# Altium PCB PCB1.PcbDoc (part 2 of 2)
Units mm, origin at the board's own origin, x right, y up, seen from the top; angles counter-clockwise.
Board outline 124.21 x 71.38 mm, 4 copper layers (Top Layer, Int1 (GND), Int2 (PWR), Bottom Layer), stack 1.369 mm thick; 127 components, 91 nets, 539 pads, 880 vias.
Unrouted connection lines stored in the file: 8.
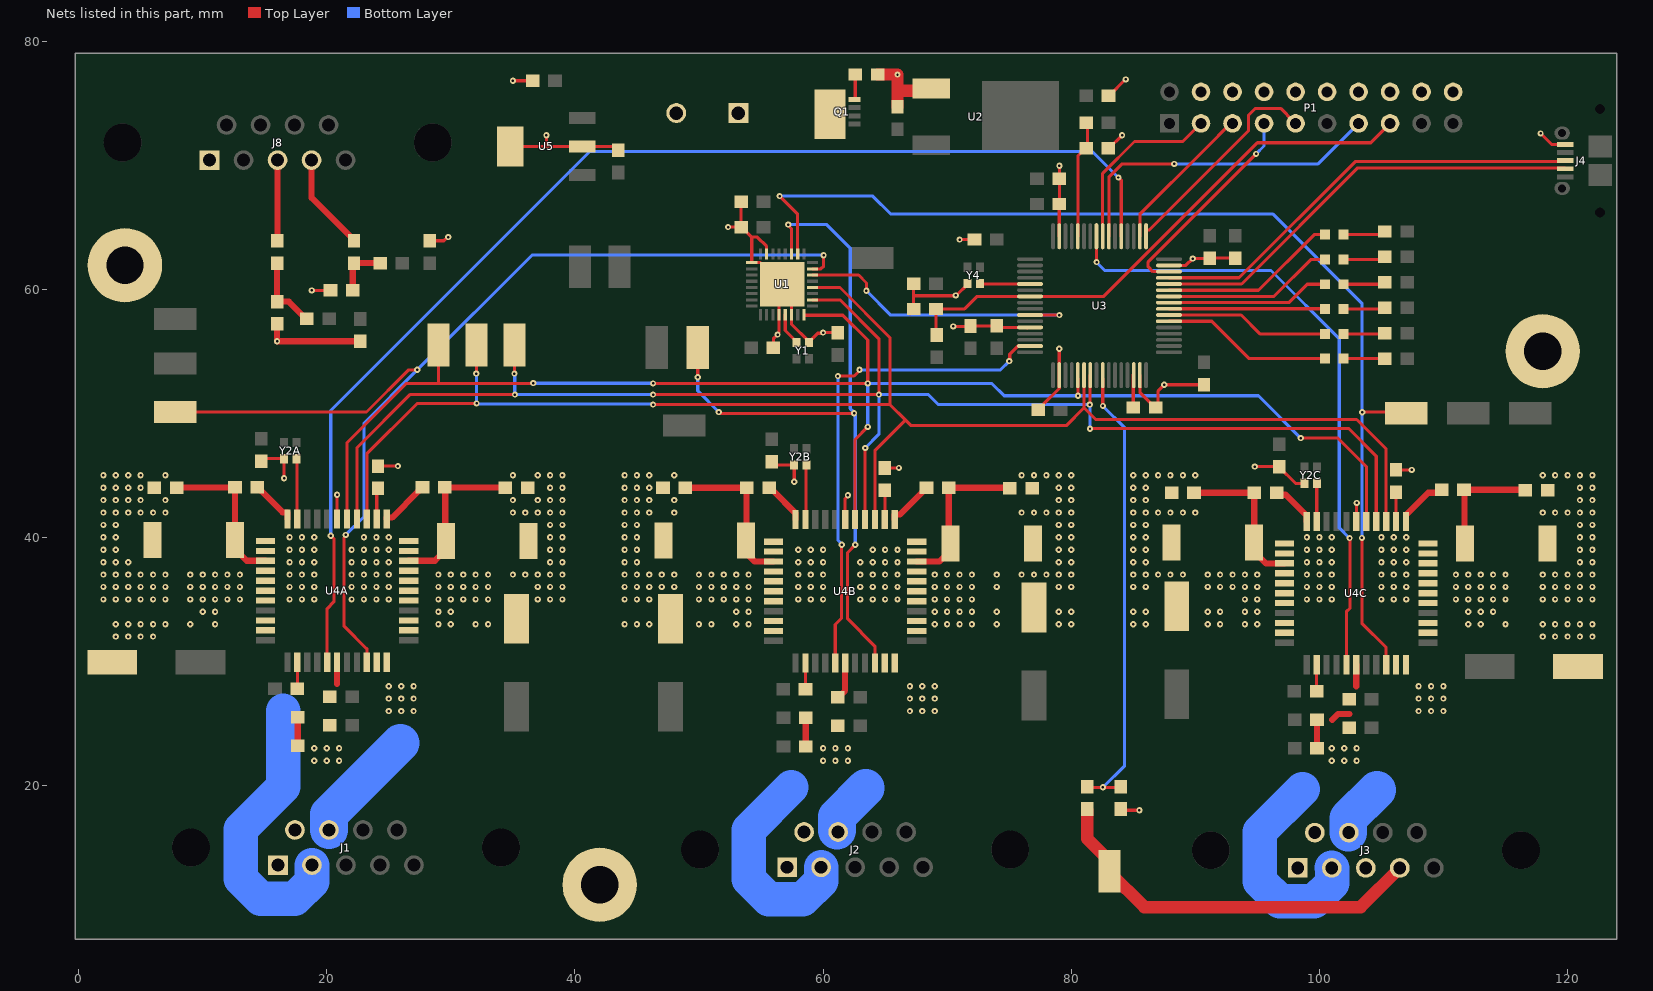
[diagram p4: the nets of this part, all layers, seen from the top]

## Via types
v1: diameter 0.5, hole 0.2, Top Layer to Bottom Layer, 880 vias

## Nets (pads, with @x,y where several pads share a name; then routed paths per layer and width w, separated by ;. In a path a pad name is that pad's centre, name@x,y a point inside that pad or via, vN(x,y) a via of type N, cw(c..) or ccw(c..) an arc to the next point about the centre after c; other vN are vias at no path point) (continued)
GND: C1.1 C2.1 C4.1 C5A.1 C5B.1 C5C.1 C6A.1 C6B.1 C6C.1 C7.1 C8.1 C9.1 C10.1 C11.1 C12.1 C13.1 C14.1 C15.1 C16.1 C18.1 C19.1 C21.1 C22.1 C23A.2 C23B.2 C23C.2 C24A.2 C24B.2 C24C.2 C25A.2 C25B.2 C25C.2 C26A.2 C26B.2 C26C.2 C27A.1 C27B.1 C27C.1 C28A.1 C28B.1 C28C.1 C29A.1 C29B.1 C29C.1 C30A.1 C30B.1 C30C.1 C31.1 C32.1 C33.1 C34.1 C35.1 C36.1 J3.3 J4.5 J5.2 J8.1 P1.4 P1.6 P1.8 P1.10 P1.12 P1.14 P1.16 P1.18 P1.20 pad.3 pad.4 R9.1 R12.2 R14.1 R18.1 R20A.2 R20B.2 R20C.2 R21A.2 R21B.2 R21C.2 U1.4 U1.6 U1.23 U1.25 U1.33 U2.1 U3.12 U3.18 U3.31 U3.47 U3.63 U4A.17 U4A.39 U4A.43 U4A.44 U4B.17 U4B.39 U4B.43 U4B.44 U4C.17 U4C.39 U4C.43 U4C.44 U5.2 U5.4 Y1.2 Y2A.2 Y2B.2 Y2C.2 Y4.2 | length 133.6
  Top Layer w0.254: C28A.1@14.732,46.144 14.928,46.34 16.398,46.34 Y2A.2@16.51,46.228 ; v1(16.557,44.757) Y2A.2@16.557,46.34 ; v1(18.8,59.9) R9.1@20.3,59.9 ; U4A.17@20.834,41.483 v1(20.834,43.434) ; C6A.1@24.13,45.742 v1(25.742,45.742) ; C18.1@28.3,63.9 29.433,63.9 29.733,64.2 v1(29.8,64.2) ; U5.4@34.9,71.5 37.7,71.5 ; v1(35,76.8) C35.1@36.6,76.8 ; v1(37.7,72.4) 37.7,71.5 ; C19.1@43.6,71.2 43.3,71.5 U5.2@40.6,71.5 37.7,71.5 ; v1(52.346,65) 53.35,65 C34.1@53.5,65 ; C34.1@53.4,65 C1.1@53.4,67.05 ; C34.1@53.55,64.9 54.256,64.194 ; U1.33@55.4,61.6 55.4,61.692 54.954,62.138 U1.25@54.256,62.138 54.256,64.194 ; U1.23@55.454,62.836 55.453,63.446 54.706,64.194 54.256,64.194 ; C28B.1@55.849,46.093 56.11,45.832 57.516,45.832 Y2B.2@57.658,45.974 ; C2.1@56,55.28 56,56.001 v1(56.339,56.34) 56.339,56.407 56.454,56.522 U1.4@56.454,57.903 ; U1.33@56.4,58.9 56.454,58.846 U1.4@56.454,57.94 ; U1.33@57.4,59 57.454,58.946 U1.6@57.454,57.94 57.454,57.171 Y1.2@58.875,55.75 ; v1(57.674,44.474) Y2B.2@57.674,45.832 ; Y1.2@58.875,55.7 Y1.2@58.875,55.75 ; Y1.2@58.9,55.725 59,55.625 Y1.2@59,55.6 ; C4.1@61.08,56.5 60.1,56.5 60.053,56.453 59.578,56.453 Y1.2@58.875,55.75 ; U4B.17@61.779,41.433 61.779,43.113 62,43.333 v1(62,43.4) ; C6B.1@64.973,45.591 v1(66.109,45.591) ; C16.1@67,58 67.299,58.299 C16.1@67.299,58.402 67.299,59.465 ; C31.1@67.349,60.452 C31.1@67.299,60.452 67.299,59.465 ; v1(70.5,57) 71.848,57 C22.1@71.882,57.034 C21.1@74.001,57.034 ; v1(70.7,59.5) 70.75,59.5 71.657,60.407 Y4.2@71.657,60.457 ; v1@70.722,59.465 67.299,59.465 ; v1(71,64) C12.1@72.2,64 ; C21.1@73.987,57.048 C21.1@74.001,57.034 ; U3.12@76.454,56.896 76.434,56.916 74.119,56.916 C21.1@74.001,57.034 ; C13.1@77.332,50.292 77.382,50.292 77.755,50.665 77.755,50.715 79.031,51.991 79.031,53.063 U3.18@79.034,53.066 v1(79.034,55.204) ; C10.1@79,66.9 79.034,66.866 U3.63@79.034,64.266 ; C10.1@79.048,66.867 79.048,68.748 C9.1@79.1,68.8 ; C9.1@79.048,68.898 v1(79.048,69.952) ; R12.2@82.998,71.349 83.048,71.349 v1(84.1,72.4) v1(84.1,72.4) ; C8.1@83,75.6 83.05,75.6 84.35,76.9 v1(84.4,76.9) ; C15.1@84,18.1 84.1,18 v1(85.5,18) ; U3.31@85.534,53.066 85.534,51.682 C32.1@86.8,50.416 ; C32.1@86.8,50.466 86.85,50.466 87,50.616 87,51.8 v1(87.5,52.3) C11.1@90.7,52.3 ; U3.47@87.884,61.916 89.243,61.916 v1(89.789,62.462) 91.14,62.462 C14.1@91.178,62.5 C33.1@93.228,62.5 ; C11.1@90.65,52.2 C11.1@90.8,52.2 ; v1(94.798,45.698) C28C.1@96.724,45.698 ; C28C.1@96.774,45.698 C28C.1@96.724,45.698 ; C28C.1@96.774,45.7 96.9,45.7 C28C.1@97,45.6 ; Y2C.2@98.8,44.35 98.072,44.35 C28C.1@96.724,45.698 ; U4C.17@102.978,41.28 102.991,41.293 102.991,42.762 v1(103.004,42.776) ; C6C.1@106.172,45.438 v1(107.438,45.438) ; v1(117.825,72.555) 118.725,71.655 J4.5@119.82,71.655
  Top Layer w0.5: R14.1@16,57.2 v1(16,55.8) C36.1@22.7,55.8 ; C25A.2@17.664,23.194 17.664,25.487 17.675,25.498 C24A.2@17.664,25.498 ; C5A.1@20.252,27.161 C5A.1@20.269,27.178 ; C5A.1@20.371,27.076 C5A.1@20.371,27.232 ; 20.834,28.2 U4A.39@20.834,29.926 ; C25B.2@58.609,23.143 58.609,25.436 58.62,25.448 C24B.2@58.609,25.448 ; C5B.1@61.197,27.11 C5B.1@61.214,27.127 ; C5B.1@61.316,27.026 61.316,27.181 61.779,27.644 U4B.39@61.779,29.876 ; C25C.2@99.808,22.991 99.808,25.284 99.819,25.295 C24C.2@99.808,25.295 ; 101.03,25.295 101.49,25.756 102.413,25.756 ; C5C.1@102.395,26.957 C5C.1@102.413,26.975 ; C5C.1@102.514,26.873 C5C.1@102.514,27.028 ; 102.978,28 U4C.39@102.978,29.723
  Top Layer w1: R18.1@64.4,77.3 v1(66,77.3) 66,76 ; C7.1@66,74.7 66,76 ; U2.1@68.4,76 66,76
  other v1: 19,22 20,22 21,22 60,22 61,22 62,22 101,22 102,22 103,22 19,23 20,23 21,23 60,23 61,23 62,23 101,23 102,23 103,23 25,26 26,26 27,26 67,26 68,26 69,26 108,26 109,26 110,26 25,27 26,27 27,27 67,27 68,27 69,27 108,27 109,27 110,27 25,28 26,28 27,28 67,28 68,28 69,28 108,28 109,28 110,28 3,32 4,32 5,32 6,32 118,32 119,32 120,32 121,32 122,32 3,33 4,33 5,33 6,33 7,33 44,33 45,33 46,33 79,33 80,33 85,33 86,33 118,33 119,33 120,33 121,33 122,33 79,34 80,34 85,34 86,34 2,35 3,35 4,35 5,35 6,35 7,35 37,35 38,35 39,35 44,35 45,35 46,35 118,35 119,35 120,35 121,35 122,35 2,36 3,36 4,36 5,36 6,36 7,36 37,36 38,36 39,36 44,36 45,36 46,36 47,36 48,36 79,36 80,36 85,36 86,36 118,36 119,36 120,36 121,36 122,36 2,37 3,37 4,37 5,37 6,37 7,37 35,37 36,37 37,37 38,37 39,37 44,37 45,37 46,37 47,37 48,37 76,37 77,37 78,37 79,37 80,37 85,37 86,37 87,37 88,37 89,37 118,37 119,37 120,37 121,37 122,37 2,38 3,38 4,38 38,38 39,38 44,38 45,38 79,38 80,38 85,38 86,38 121,38 122,38 2,39 3,39 38,39 39,39 44,39 45,39 79,39 80,39 85,39 86,39 121,39 122,39 2,40 3,40 38,40 39,40 44,40 45,40 79,40 80,40 85,40 86,40 121,40 122,40 2,41 3,41 38,41 39,41 44,41 45,41 79,41 80,41 85,41 86,41 121,41 122,41 2,42 3,42 4,42 5,42 6,42 7,42 35,42 36,42 37,42 38,42 39,42 44,42 45,42 46,42 48,42 76,42 77,42 78,42 79,42 80,42 85,42 86,42 87,42 88,42 89,42 90,42 118,42 119,42 120,42 121,42 122,42 2,43 3,43 4,43 5,43 7,43 35,43 37,43 38,43 39,43 44,43 45,43 46,43 48,43 79,43 80,43 85,43 86,43 121,43 122,43 2,44 3,44 4,44 5,44 38,44 39,44 44,44 45,44 46,44 79,44 80,44 85,44 86,44 121,44 122,44 2,45 3,45 4,45 5,45 7,45 35,45 37,45 38,45 39,45 44,45 45,45 46,45 48,45 76,45 77,45 78,45 79,45 80,45 85,45 86,45 87,45 88,45 89,45 90,45 118,45 119,45 120,45 121,45 122,45 60,56.5
INT1: U1.14 U3.10 | length 24
  Top Layer w0.254: U1.14@59.152,61.138 62.862,61.138 63.5,60.5 v1(63.5,59.869) ; U3.10@76.684,57.916 79.048,57.916 v1(79.053,57.911)
  Bottom Layer w0.254: v1(63.5,59.869) 65.457,57.911 v1(79.053,57.911)
MISO: J7.1 U1.12 U3.22 U4A.14 U4B.14 U4C.14 | length 127.1
  Top Layer w0.254: U4A.14@23.234,41.483 23.234,46.734 27.287,50.787 v1(32.082,50.787) ; v1(32.057,53.2) 32.057,55.1 J7.1@32.157,55.2 ; v1(46.3,50.7) 65.4,50.7 ; U1.12@59.152,60.138 61.362,60.138 65.4,56.1 65.4,50.7 ; U4B.14@64.179,41.433 64.179,46.979 66.142,48.942 66.142,48.945 66.619,49.423 66.627,49.423 66.627,49.473 ; U3.22@81.034,53.066 81.034,50.434 ; U4C.14@105.378,41.28 105.378,47.122 103,49.5 81.968,49.5 81.034,50.434 ; 65.4,50.7 66.627,49.473 ; 66.627,49.473 67.094,49.006 79.606,49.006 81.034,50.434
  Bottom Layer w0.254: v1(32.057,53.2) 32.069,53.188 32.069,50.8 v1(32.082,50.787) 32.125,50.744 46.256,50.744 v1(46.3,50.7)
MOSI: J9.1 U1.10 U3.23 U4A.15 U4B.15 U4C.15 | length 126.3
  Top Layer w0.254: U4A.15@22.434,41.483 22.434,47.234 26.702,51.502 v1(35.171,51.502) ; v1(35.125,53.201) J9.1@35.125,55.501 ; v1(46.3,51.5) v1(64.5,51.5) 64.5,56 61.362,59.138 U1.10@59.152,59.138 ; U4B.15@63.379,41.433 63.39,41.443 63.39,47.19 v1(63.4,47.2) ; v1(81.5,50.7) 81.525,50.725 81.525,53.057 U3.23@81.534,53.066 ; v1(81.513,48.746) 81.545,48.778 102.347,48.778 104.578,46.547 U4C.15@104.578,41.28
  Bottom Layer w0.254: v1@35.132,53.262 35.148,53.246 35.148,51.525 v1(35.171,51.502) 40.734,51.502 40.737,51.5 v1(46.3,51.5) ; v1(63.4,47.2) 64.5,48.3 v1(64.5,51.5) 68.5,51.5 69.3,50.7 v1(81.5,50.7) ; v1@81.463,50.687 81.507,50.643 81.507,48.752 v1(81.513,48.746)
NetC3A_2: C3A.2 U4A.35 | length 2.4
  Top Layer w0.254: C3A.2@17.634,27.803 U4A.35@17.634,29.926 17.634,30.182 U4A.35@17.678,30.226
NetC3B_2: C3B.2 U4B.35 | length 2.4
  Top Layer w0.254: C3B.2@58.579,27.752 U4B.35@58.579,29.876 58.579,30.131 U4B.35@58.623,30.175
NetC3C_2: C3C.2 U4C.35 | length 2.4
  Top Layer w0.254: C3C.2@99.778,27.599 U4C.35@99.778,29.723 99.778,29.979 U4C.35@99.822,30.023
NetC6A_2: C6A.2 U4A.13 | length 2.5
  Top Layer w0.254: U4A.13@24.034,41.483 24.034,43.846 C6A.2@24.13,43.942
NetC6B_2: C6B.2 U4B.13 | length 2.3
  Top Layer w0.254: U4B.13@64.979,41.433 64.979,43.643 C6B.2@65.024,43.688
NetC6C_2: C6C.2 U4C.13 | length 2.2
  Top Layer w0.254: C6C.2@106.172,43.434 106.178,43.428 U4C.13@106.178,41.28
NetC15_2: C15.2 R6.2 U3.25 | length 37.2
  Top Layer w0.254: R6.2@81.3,19.9 81.348,19.852 82.515,19.852 v1@82.583,19.92 ; U3.25@82.534,52.822 82.543,52.813 82.543,50.596 v1(82.552,50.587) ; v1(82.556,19.852) 83.952,19.852 C15.2@84,19.9
  Bottom Layer w0.254: v1(82.552,50.587) 84.3,48.838 84.3,21.587 v1@82.565,19.852
NetC29A_2: C29A.2 R2A.2 R20A.1 U4A.9 | length 13.3
  Top Layer w0.5: U4A.9@26.613,38.105 28.721,38.105 29.718,39.102 R20A.1@29.718,39.522 ; R2A.2@29.464,43.993 29.555,43.902 29.555,39.745 R20A.1@29.596,39.705 ; R2A.2@29.515,44.045 29.537,44.023 34.477,44.023 C29A.2@34.5,44
NetC29B_2: C29B.2 R2B.2 R20B.1 U4B.9 | length 13.3
  Top Layer w0.5: U4B.9@67.558,38.054 69.388,38.054 70.409,39.074 R20B.1@70.409,39.268 ; R20B.1@70.358,39.37 70.136,39.592 70.136,43.99 R2B.2@70.14,43.995 C29B.2@75.206,43.994
NetC29C_2: C29C.2 R2C.2 R20C.1 U4C.9 | length 10
  Top Layer w0.5: R2C.2@111.608,43.79 111.699,43.698 111.699,39.542 R20C.1@111.739,39.502 ; R2C.2@111.659,43.841 C29C.2@116.559,43.841 ; R20C.1@111.76,38.798 R20C.1@111.76,39.522
NetC30A_2: C30A.2 R4A.2 R21A.1 U4A.25 | length 11.8
  Top Layer w0.5: C30A.2@7.922,44.022 R4A.2@12.603,44.022 ; R4A.2@12.548,44.094 12.603,44.039 R4A.2@12.603,44.022 ; R21A.1@12.594,39.787 12.603,39.797 R4A.2@12.603,44.022 ; R21A.1@12.751,38.71 12.947,38.71 13.551,38.105 U4A.25@15.056,38.105 ; R4A.2@12.8,43.9 12.678,44.022 R4A.2@12.603,44.022
NetC30B_2: C30B.2 R4B.2 R21B.1 U4B.25 | length 12
  Top Layer w0.508: C30B.2@48.904,43.996 R4B.2@53.828,43.996 ; R21B.1@53.793,39.726 53.828,39.76 R4B.2@53.828,43.996 ; R4B.2@53.797,44.145 53.828,44.115 R4B.2@53.828,43.996 ; R21B.1@53.95,38.71 53.95,38.601 54.496,38.054 U4B.25@56.001,38.054 ; R4B.2@54,43.9 53.904,43.996 R4B.2@53.828,43.996
NetC30C_2: C30C.2 R4C.2 R21C.1 U4C.25 | length 12.6
  Top Layer w0.5: C30C.2@89.9,43.6 R4C.2@94.747,43.6 ; R21C.1@94.6,39.4 94.6,38.997 95.695,37.902 U4C.25@97.2,37.902 ; R21C.1@94.747,39.593 R4C.2@94.747,43.6 ; R4C.2@94.8,43.6 R4C.2@94.747,43.6 ; R4C.2@94.894,43.79 94.747,43.642 R4C.2@94.747,43.6
NetC32_2: C32.2 U3.30 | length 2.6
  Top Layer w0.254: C32.2@85,50.466 U3.30@85,53.1
NetDS1_1: DS1.1 R3.2 | length 3.3
  Top Layer w0.254: DS1.1@101.945,54.4 R3.2@105.272,54.4
NetDS1_2: DS1.2 U3.38 | length 13.8
  Top Layer w0.254: U3.38@87.884,57.416 91.334,57.416 94.351,54.4 DS1.2@100.445,54.4
NetDS2_1: DS2.1 R5.2 | length 3.3
  Top Layer w0.254: DS2.1@101.945,56.4 105.222,56.4 R5.2@105.272,56.45
NetDS2_2: DS2.2 U3.39 | length 13.2
  Top Layer w0.254: U3.39@87.884,57.916 93.692,57.916 95.209,56.4 DS2.2@100.445,56.4
NetDS3_1: DS3.1 R17.2 | length 3.4
  Top Layer w0.254: DS3.1@101.945,58.4 105.171,58.4 R17.2@105.272,58.5
NetDS3_2: DS3.2 U3.40 | length 12.6
  Top Layer w0.254: U3.40@87.884,58.416 100.429,58.416 DS3.2@100.445,58.4
NetDS4_1: DS4.1 R15.2 | length 3.4
  Top Layer w0.254: DS4.1@101.945,60.4 105.121,60.4 R15.2@105.272,60.55
NetDS4_2: DS4.2 U3.41 | length 13.2
  Top Layer w0.254: U3.41@87.884,58.916 97.536,58.916 99.02,60.4 DS4.2@100.445,60.4
NetDS5_1: DS5.1 R19.2 | length 3.4
  Top Layer w0.254: DS5.1@101.945,62.4 105.071,62.4 R19.2@105.272,62.601
NetDS5_2: DS5.2 U3.42 | length 13.8
  Top Layer w0.254: U3.42@87.884,59.416 96.347,59.416 99.33,62.4 DS5.2@100.445,62.4
NetDS6_1: DS6.1 R22.2 | length 3.4
  Top Layer w0.254: DS6.1@101.945,64.4 105.021,64.4 R22.2@105.272,64.651
NetDS6_2: DS6.2 U3.43 | length 14.4
  Top Layer w0.254: U3.43@87.884,59.916 95.094,59.916 99.578,64.4 DS6.2@100.445,64.4
NetJ1_1: J1.1 U4A.26 U4A.27 U4A.31 U4A.32
  other v1: 9,33 11,33 10,34 11,34 9,35 10,35 11,35 12,35 13,35 9,36 10,36 11,36 12,36 13,36 9,37 10,37 11,37 12,37 13,37
NetJ1_2: J1.2 U4A.23 U4A.24 U4A.28 U4A.29 | length 23.2
  Bottom Layer w2.794: 16.502,26 16.502,19.911 13.062,16.471 13.062,12.49 14.681,10.871 17.424,10.871 18.807,12.254 J1.2@18.807,13.58
  other v1: 17,35 18,35 19,35 17,36 18,36 19,36 17,37 18,37 19,37 17,38 18,38 19,38 17,39 18,39 19,39 17,40 18,40 19,40
NetJ1_6: J1.6 U4A.2 U4A.3 U4A.7 U4A.8
  other v1: 29,33 30,33 32,33 33,33 29,34 30,34 29,35 30,35 31,35 32,35 33,35 29,36 30,36 31,36 32,36 33,36 29,37 30,37 31,37 32,37 33,37
NetJ1_7: J1.7 U4A.5 U4A.6 U4A.10 U4A.11 | length 9.4
  Bottom Layer w3.048: J1.7@20.177,16.42 20.177,17.677 25.934,23.434
  other v1: 22,35 23,35 24,35 25,35 22,36 23,36 24,36 25,36 22,37 23,37 24,37 25,37 22,38 23,38 24,38 25,38 22,39 23,39 24,39 25,39 23,40 24,40 25,40
NetJ2_1: J2.1 U4B.26 U4B.27 U4B.31 U4B.32
  other v1: 50,33 51,33 53,33 54,33 53,34 54,34 50,35 51,35 52,35 53,35 54,35 50,36 51,36 52,36 53,36 54,36 50,37 51,37 52,37 53,37 54,37
NetJ2_2: J2.2 U4B.23 U4B.24 U4B.28 U4B.29 | length 17.1
  Bottom Layer w2.794: 57.447,19.86 54.007,16.42 54.007,12.439 55.626,10.82 58.369,10.82 59.846,12.297 J2.2@59.846,13.411
  other v1: 58,35 59,35 60,35 58,36 59,36 60,36 58,37 59,37 60,37 58,38 59,38 60,38 58,39 59,39 60,39
NetJ2_6: J2.6 U4B.2 U4B.3 U4B.7 U4B.8
  other v1: 69,33 70,33 71,33 72,33 74,33 69,34 70,34 71,34 72,34 74,34 69,35 70,35 71,35 72,35 69,36 70,36 71,36 72,36 74,36 69,37 70,37 71,37 72,37 74,37
NetJ2_7: J2.7 U4B.5 U4B.6 U4B.10 U4B.11 | length 4.4
  Bottom Layer w3.048: J2.7@61.122,16.369 61.122,17.484 63.434,19.797
  other v1: 63,35 64,35 65,35 66,35 63,36 64,36 65,36 66,36 63,37 64,37 65,37 66,37 63,38 64,38 65,38 66,38 64,39 65,39 66,39
NetJ3_1: J3.1 U4C.26 U4C.27 U4C.31 U4C.32
  other v1: 91,33 92,33 94,33 95,33 91,34 92,34 94,34 95,34 94,35 95,35 91,36 92,36 93,36 94,36 95,36 91,37 92,37 93,37 94,37 95,37
NetJ3_2: J3.2 U4C.23 U4C.24 U4C.28 U4C.29 | length 17.2
  Bottom Layer w2.794: 98.646,19.707 95.206,16.267 95.206,12.287 96.825,10.668 99.568,10.668 101.031,12.131 101.031,13.33 J3.2@101,13.36
  other v1: 99,35 100,35 101,35 99,36 100,36 101,36 99,37 100,37 101,37 99,38 100,38 101,38 99,39 100,39 101,39 99,40 100,40 101,40
NetJ3_6: J3.6 U4C.2 U4C.3 U4C.7 U4C.8
  other v1: 112,33 113,33 115,33 112,34 113,34 114,34 111,35 112,35 113,35 114,35 115,35 111,36 112,36 113,36 114,36 115,36 111,37 112,37 113,37 114,37 115,37
NetJ3_7: J3.7 U4C.5 U4C.6 U4C.10 U4C.11 | length 4.4
  Bottom Layer w3.048: J3.7@102.32,16.217 102.32,17.332 104.633,19.645
  other v1: 105,35 106,35 107,35 105,36 106,36 107,36 105,37 106,37 107,37 105,38 106,38 107,38 105,39 106,39 107,39 105,40 106,40 107,40
NetJ5_1: J5.1 Q1.5-6-7-8
NetJ8_3: J8.3 R10.2 | length 6.9
  Top Layer w0.5: R10.2@16.2,63.8 16.04,63.96 J8.3@16.04,70.4 16.04,70.44 J8.3@16.2,70.6
NetJ8_4: J8.4 R7.2 | length 7.9
  Top Layer w0.5: J8.4@18.7,70.4 18.78,70.32 18.78,67.37 22.2,63.95 R7.2@22.2,63.9
NetQ1_4: Q1.4 R18.2 | length 1.8
  Top Layer w0.254: Q1.4@62.535,75.291 62.6,75.356 R18.2@62.6,77.1
NetR1_1: R1.1 R12.1 U3.60 | length 9.4
  Top Layer w0.254: U3.60@80.534,64.266 80.534,70.736 81.098,71.3 R12.1@81.2,71.3 ; R12.1@81.198,71.349 81.3,71.452 R1.1@81.3,73.3
NetR2A_1: R2A.1 U4A.12 | length 4
  Top Layer w0.5: U4A.12@24.834,41.483 24.834,41.589 24.838,41.593 25.263,41.593 27.415,43.745 27.415,43.795 27.665,44.045 R2A.1@27.715,44.045
NetR2B_1: R2B.1 U4B.12 | length 3.9
  Top Layer w0.5: U4B.12@65.783,41.433 65.783,41.845 66.207,41.845 68.04,43.678 68.04,43.745 68.274,43.978 R2B.1@68.34,43.978
NetR2C_1: R2C.1 U4C.12 | length 4.2
  Top Layer w0.5: U4C.12@106.978,41.28 106.978,41.801 106.982,41.805 106.992,41.805 108.779,43.592 109.608,43.592 R2C.1@109.858,43.842
NetR4A_1: R4A.1 U4A.22 | length 3.8
  Top Layer w0.5: R4A.1@14.413,44.044 14.463,44.044 14.713,43.794 14.713,43.744 16.448,42.008 16.83,42.008 16.834,42.004 U4A.22@16.834,41.483
NetR4B_1: R4B.1 U4B.22 | length 3.3
  Top Layer w0.5: R4B.1@55.829,43.942 55.829,43.876 55.962,43.743 55.99,43.743 57.779,41.953 U4B.22@57.779,41.433
NetR4C_1: R4C.1 U4C.22 | length 3.7
  Top Layer w0.5: R4C.1@96.556,43.588 96.709,43.435 97.281,43.435 98.911,41.805 98.974,41.805 98.978,41.801 U4C.22@98.978,41.28
NetR7_1: R7.1 R8.1 R9.2 | length 4.2
  Top Layer w0.5: R9.2@22.1,59.9 R7.1@22.1,62.2 ; R7.1@22.2,62.1 24,62.1 R8.1@24.1,62.2
NetR10_1: R10.1 R11.1 R14.2 | length 6.1
  Top Layer w0.5: R10.1@16,62 R14.2@16,59 16.95,59 18.4,57.55 R11.1@18.4,57.5
NetU1_5: U1.5 Y1.3 | length 2.7
  Top Layer w0.254: U1.5@56.954,57.94 56.954,56.671 57.8,55.825 Y1.3@57.8,55.6
NetU3_5: U3.5 Y4.3 | length 3.8
  Top Layer w0.254: Y4.3@72.898,60.452 72.932,60.418 U3.5@76.682,60.418
NetU4A_21: U4A.21 Y2A.3 | length 5
  Top Layer w0.254: Y2A.3@17.526,46.482 17.596,46.412 17.596,41.522 U4A.21@17.634,41.483
NetU4B_21: U4B.21 Y2B.3 | length 4.5
  Top Layer w0.254: U4B.21@58.565,41.447 U4B.21@58.579,41.433 58.627,41.48 58.627,45.792 Y2B.3@58.587,45.831
NetU4C_21: U4C.21 Y2C.3 | length 3.1
  Top Layer w0.254: U4C.21@99.778,41.28 99.789,41.291 99.789,44.389 Y2C.3@99.8,44.4
nRST: C16.2 P1.15 R13.1 U3.7 | length 44.8
  Top Layer w0.254: R13.1@69.099,56.351 69.099,58.359 C16.2@69.104,58.365 ; C16.2@69.105,58.408 71.408,58.408 72.416,59.416 U3.7@76.684,59.416 82.616,59.416 95,71.8 104.14,71.8 105.44,73.1 P1.15@105.8,73.1
POL: J3.4 J10.1 R6.1 | length 31.5
  Top Layer w1: R6.1@81.3,18 81.3,15.7 82.685,14.315 82.71,14.315 83.1,13.925 J10.1@83.1,13.1 ; J10.1@83.1,13 85.9,10.2 103.32,10.2 J3.4@106.48,13.36
SCK: J6.1 U1.8 U3.21 U4A.16 U4B.16 U4C.16 | length 122.9
  Top Layer w0.254: U4A.16@21.634,41.483 21.634,47.634 26.4,52.4 29,52.4 ; J6.1@29,55.5 29,52.4 ; v1(36.642,52.427) 36.615,52.4 29,52.4 ; v1(46.3,52.4) v1(63.6,52.4) 63.6,55.9 61.6,57.9 U1.8@58.5,57.9 ; U4B.16@62.579,41.433 62.579,47.879 v1(63.6,48.9) ; U3.21@80.534,52.812 80.54,52.805 80.54,51.418 v1(80.547,51.411) ; v1(98.5,48) 101.5,48 103.8,45.7 U4C.16@103.8,41.1
  Bottom Layer w0.254: v1(36.642,52.427) 36.655,52.413 46.287,52.413 v1(46.3,52.4) ; v1(63.6,48.9) v1@63.6,52.3 ; v1(63.6,52.4) 73.6,52.4 74.592,51.408 80.544,51.408 v1(80.547,51.411) 95.089,51.411 v1(98.5,48)
SG_TST_ALT: U3.15 U4B.38 | length 40.3
  Top Layer w0.254: U4B.38@60.979,29.876 60.979,32.979 61.5,33.5 v1(61.5,39.4) ; v1(61.2,53) 62.5,53 62.936,53.436 v1(62.936,53.501) ; v1(75,54.2) 75.045,54.245 75.045,54.759 75.693,55.407 76.675,55.407 U3.15@76.684,55.416
  Bottom Layer w0.254: v1(61.2,53) 61.2,39.767 61.5,39.467 v1(61.5,39.4) ; v1(62.936,53.501) 74.3,53.5 v1(75,54.2)
SG_TST_AZI: U3.53 U4A.38 | length 98.5
  Top Layer w0.254: U4A.38@20.034,29.926 20.034,34.258 20.574,34.798 20.574,39.905 20.347,40.132 v1(20.32,40.132) ; v1(83.8,69) 83.807,69 84.034,68.773 U3.53@84.034,64.266
  Bottom Layer w0.254: v1(20.32,40.132) 20.32,50.22 41.2,71.1 81.7,71.1 v1(83.8,69)
SG_TST_POL: U3.57 U4C.38 | length 51
  Top Layer w0.254: U3.57@82.031,64.254 82.037,64.248 82.037,62.187 v1(82.04,62.184) ; U4C.38@102.178,29.723 102.178,34.004 102.464,34.29 102.464,39.906 v1(102.428,39.941)
  Bottom Layer w0.254: v1(82.04,62.184) 82.04,62.16 82.7,61.5 96.1,61.5 101.6,56 101.6,40.77 v1(102.428,39.941)
STEP1: J19.1 U1.15 U4A.42 | length 86.1
  Top Layer w0.254: J19.1@7.8,50.1 23.2,50.1 26.6,53.5 v1(27.3,53.5) ; v1(21.539,40.2) 21.539,40.134 21.402,39.997 21.402,32.827 23.202,31.028 23.234,31.028 U4A.42@23.234,29.926 ; U1.15@59.152,61.638 59.829,61.638 60.043,61.851 v1(60.043,62.741)
  Bottom Layer w0.254: v1(21.539,40.2) 23,41.661 23,49.2 v1(27.3,53.5) 36.541,62.741 v1(60.043,62.741)
STEP2: J20.1 U1.18 U4C.42 | length 88.6
  Top Layer w0.254: v1(56.5,67.5) 57.954,66.046 U1.18@57.954,62.836 ; v1(103.424,39.955) 103.424,33.076 105.378,31.122 U4C.42@105.378,29.723 ; v1(103.447,50.089) 105.911,50.089 J20.1@106,50 ; J20.1@107,50.1 J20.1@107.231,50.1
  Bottom Layer w0.254: v1(56.5,67.5) 64,67.5 65.435,66.065 96.235,66.065 103.429,58.871 103.429,50.089 103.435,50.083 103.435,39.967 v1(103.424,39.955)
STEP3: J21.1 U1.19 U4B.42 | length 59.8
  Top Layer w0.254: v1(49.9,52.9) 49.9,54.9 J21.1@50.1,55.1 ; v1(51.6,50.1) 51.667,50.1 51.796,49.971 62.471,49.971 v1(62.5,50) ; v1(57.195,65.204) 57.195,65.138 57.454,64.879 U1.19@57.454,62.836 ; v1(62.6,39.4) 61.976,38.776 61.976,33.424 64.179,31.221 U4B.42@64.179,29.876
  Bottom Layer w0.254: v1(49.9,52.9) 49.9,51.8 v1(51.6,50.1) ; v1(57.195,65.204) 60.296,65.204 62.196,63.304 62.196,50.37 62.5,50.067 62.5,49.933 62.6,49.833 v1(62.6,39.4)
SWCLK: P1.9 U3.49 | length 17.7
  Top Layer w0.254: U3.49@86.034,64.266 86.034,64.756 86.055,64.778 86.307,64.778 94.276,72.746 94.276,73.993 94.851,74.568 96.872,74.568 97.9,73.54 P1.9@97.9,73.4
SWDIO: P1.7 U3.46 | length 17.5
  Top Layer w0.254: U3.46@87.884,61.416 86.584,61.416 86.2,61.8 86.2,62.2 v1(94.9,70.9)
  Bottom Layer w0.254: v1(94.9,70.9) 95.54,71.54 P1.7@95.54,73.36 P1.7@95.4,73.5
TDI: P1.5 U3.50 | length 12.3
  Top Layer w0.254: U3.50@85.534,64.266 85.534,66.034 90.8,71.3 92.86,73.36 P1.5@93,73.36
TRACESWO: P1.13 U3.55 | length 26.3
  Top Layer w0.254: U3.55@83.034,64.266 83.034,69.034 84.1,70.1 v1(88.3,70.1)
  Bottom Layer w0.254: v1(88.3,70.1) 99.9,70.1 P1.13@102.9,73.1
TRST: P1.3 U3.56 | length 14.7
  Top Layer w0.254: U3.56@82.534,64.266 82.534,69.334 85.1,71.9 89,71.9 P1.3@90.46,73.36
USB_D_N: J4.2 U3.44 | length 35.8
  Top Layer w0.254: U3.44@87.884,60.416 90.584,60.416 ; 90.61,60.416 93.736,60.416 103.093,69.774 119.751,69.774 J4.2@119.82,69.705
USB_D_P: J4.3 U3.45 | length 35.8
  Top Layer w0.254: U3.45@87.884,60.916 90.396,60.916 ; 90.396,60.92 90.4,60.924 93.525,60.924 102.883,70.282 119.747,70.282 J4.3@119.82,70.355
pads on no net: J1. J1.3 J1.4 J1.5 J1.8 J1.9 J2. J2.3 J2.4 J2.5 J2.8 J2.9 J3. J3.5 J3.8 J4.1 J4.4 J4.Shell J8. J8.5 J8.6 J8.7 J8.8 J8.9 P1.11 P1.17 P1.19 U1.1 U1.2 U1.9 U1.11 U1.13 U1.16 U1.24 U1.26 U1.28 U1.29 U1.30 U1.31 U1.32 U3.3 U3.4 U3.6 U3.8 U3.9 U3.11 U3.14 U3.20 U3.24 U3.26 U3.27 U3.28 U3.29 U3.33 U3.34 U3.35 U3.54 U3.61 U3.62 U4A.20 U4A.34 U4A.37 U4B.20 U4B.34 U4B.37 U4C.20 U4C.34 U4C.37

## Polygon pours and split planes (outlines as drawn)
NetJ3_7 on Top Layer "NETJ3_7_L01_P082" (solid, pour order 82): 109.651,40.5 104.862,40.5 103.778,39.416 103.778,34.698 104.076,34.4 109.651,34.4 109.651,35.786 107.7,35.786 107.7,38.452 109.651,38.452
NetJ5_1 on Top Layer "NETJ5_1_L01_P047" (solid, remove dead copper, pour order 47): 51,78.4 51,71.2 61.4,71.2 61.4,78.4
GND on Top Layer "GND_L01_P051" (solid, pour order 51): 105.9,30.5 110.626,30.5 110.626,25 105.9,25
+12 on Top Layer "+12_L01_P069" (solid, pour order 69): 55.186,33.8 55.186,34.4 60.4,34.4 60.7,34.1 60.7,29.077 59.134,29.077 59.134,30.934 59.001,31.067 57.538,31.067 57.356,30.885 57.356,21.503 43.4,21.503 43.4,31.889 57.069,31.889 57.201,32.02 57.201,33.499 56.9,33.8
+12 on Top Layer "+12_L01_P068" (solid, pour order 68): 107.895,33.6 109.6,33.6 109.6,34.2 103.8,34.2 103.8,33 106.125,30.675 109.425,30.675 109.728,30.372 109.728,21.3 123.3,21.3 123.3,31.789 107.911,31.789 107.696,32.004 107.696,33.401
+12 on Top Layer "s" (solid, pour order 48): 61.5,77 72.573,77 72.573,67.5 61.5,67.5
GND on Top Layer "GND_L01_P070" (solid, pour order 70): 84.2,31.1 90.385,31.1 90.385,45.5 84.2,45.5
+3v3 on Top Layer "+3V3_L01_P088" (solid, remove dead copper, pour order 88): 0.5,78.4 123.341,78.4 123.341,8.3 0.5,8.3
+12 on Top Layer "+12_L01_P073" (solid, pour order 73): 25.671,33.853 27.449,33.853 27.449,34.4 21.7,34.4 21.7,33.1 23.927,30.873 26.619,30.873 27.703,29.789 27.703,21.5 39.6,21.5 39.6,31.987 25.671,31.987
GND on Top Layer "GND_L01_P072" (solid, pour order 72): 43.4,31.4 49,31.4 49,46 43.4,46
GND on Top Layer "GND_L01_P050" (solid, pour order 50): 8,29 0.5,29 0.5,45.4 8,45.4
GND on Top Layer "GND_L01_P046" (solid, pour order 46): 117.434,29 123.3,29 123.3,45.8 117.434,45.8
+12 on Top Layer "+12_L01_P053" (solid, pour order 53): 96.385,33.6 96.385,34.2 101.6,34.2 101.9,33.9 101.9,28.924 100.333,28.924 100.333,30.491 99.909,30.915 98.915,30.915 98.555,30.555 98.555,21.3 84.2,21.3 84.2,31.8 98.3,31.8 98.3,33.6
+12 on Top Layer "+12_L01_P066" (solid, pour order 66): 14.241,33.8 14.241,34.4 19.4,34.4 19.7,34.1 19.7,29.127 18.189,29.127 18.189,30.985 18.056,31.118 16.593,31.118 16.411,30.936 16.411,22.253 15.748,21.59 0.509,21.59 0.509,31.94 16.125,31.94 16.125,33.8
GND on Top Layer "GND_L01_P075" (solid, pour order 75): 34,31.4 39.6,31.4 39.6,45.974 34,45.974
GND on Top Layer "GND_L01_P067" (solid, pour order 67): 75,31.1 81.3,31.1 81.3,45.5 75,45.5
GND on Top Layer "GND_L01_P045" (solid, pour order 45): 23.622,30.734 27.066,30.734 27.432,30.368 27.432,25 23.622,25
NetJ1_1 on Top Layer "NETJ1_1_L01_P049" (solid, pour order 49): 15.831,32.2 15.831,33.6 13.9,33.6 13.9,36.2 15.831,36.2 15.831,37.6 8.272,37.6 8.029,37.357 8.029,32.48 8.309,32.2
NetJ1_2 on Top Layer "NETJ1_2_L01_P078" (solid, pour order 78): 14.241,36 16.1,36 16.1,38.655 14.241,38.655 14.241,40.395 19.259,40.395 20.034,39.619 20.034,34.905 19.73,34.6 14.241,34.6
NetJ1_7 on Top Layer "NETJ1_7_L01_P081" (solid, pour order 81): 27.507,40.414 22.429,40.414 21.7,39.685 21.7,34.6 27.507,34.6 27.507,35.99 25.6,35.99 25.6,38.655 27.507,38.655
NetJ1_6 on Top Layer "NETJ1_6_L01_P058" (solid, pour order 58): 25.838,37.6 33.668,37.6 33.836,37.432 33.836,32.479 33.556,32.2 25.838,32.2 25.838,33.6 27.8,33.6 27.8,36.2 25.838,36.2
GND on Top Layer "GND_L01_P085" (solid, pour order 85): 17,28.3 21.2,28.3 21.2,21.5 17,21.5
+12 on Top Layer "+12_L01_P054" (solid, pour order 54): 66.802,33.782 68.326,33.782 68.326,34.316 62.6,34.316 62.6,33.158 64.956,30.802 68.258,30.802 68.58,30.48 68.58,21.4 81.3,21.4 81.3,31.916 66.636,31.916 66.548,32.004 66.548,33.528
GND on Top Layer "GND_L01_P052" (solid, pour order 52): 64.719,30.7 70,30.7 70,25 64.719,25
NetJ3_1 on Top Layer "NETJ3_1_L01_P056" (solid, pour order 56): 98.1,32 98.1,33.4 96.2,33.4 96.2,36 97.974,36 97.974,37.4 90.419,37.4 90.173,37.154 90.173,32.277 90.45,32
NetJ3_2 on Top Layer "NETJ3_2_L01_P079" (solid, pour order 79): 96.385,35.8 98.2,35.8 98.2,38.452 96.385,38.452 96.385,40.5 101.094,40.5 102.178,39.416 102.178,34.702 101.876,34.4 96.385,34.4
NetJ3_6 on Top Layer "NETJ3_6_L01_P055" (solid, pour order 55): 107.9,37.4 116.6,37.4 117.235,36.765 117.235,32 107.982,32 107.982,33.4 109.8,33.4 109.8,36 107.9,36
NetC29C_2 on Top Layer "NETC29C_2_L01_P083" (solid, pour order 83): 107.9,37.6 107.9,38.2 110.234,38.2 110.287,38.252 110.287,40.894 112.42,40.894 112.42,37.744 112.276,37.6
GND on Top Layer "GND_L01_P087" (solid, pour order 87): 99.212,28.5 103.3,28.5 103.3,21.3 99.212,21.3
NetJ2_1 on Top Layer "NETJ2_1_L01_P059" (solid, pour order 59): 56.775,32.2 56.775,33.525 54.9,33.525 54.9,36.2 56.775,36.2 56.775,37.5 49.168,37.5 48.974,37.306 48.974,32.429 49.203,32.2
NetJ2_2 on Top Layer "NETJ2_2_L01_P077" (solid, pour order 77): 55.186,36 57.1,36 57.1,38.6 55.186,38.6 55.186,40.256 60.291,40.256 60.979,39.569 60.979,34.854 60.725,34.6 55.186,34.6
NetJ2_7 on Top Layer "NETJ2_7_L01_P080" (solid, pour order 80): 68.452,40 63.011,40 62.579,39.569 62.579,34.85 62.929,34.5 68.452,34.5 68.452,35.939 66.5,35.939 66.5,38.5 68.452,38.5
NetJ2_6 on Top Layer "NETJ2_6_L01_P057" (solid, pour order 57): 66.783,37.6 74.562,37.6 74.78,37.381 74.78,32.429 74.577,32.225 66.783,32.225 66.783,33.483 68.7,33.483 68.7,36.2 66.783,36.2
GND on Top Layer "GND_L01_P084" (solid, pour order 84): 58.014,28.1 62.1,28.1 62.1,21.3 58.014,21.3
GND on Bottom Layer "GND_L04_P086" (solid, remove dead copper, pour order 86): 123.3,78.4 123.3,8.3 0.7,8.3 0.7,78.4
NetJ1_7 on Bottom Layer "NETJ1_7_L04_P061" (solid, pour order 61): 21.387,16.887 27.5,23 27.5,40.4 22.4,40.4 21.387,39.387
NetJ3_2 on Bottom Layer "NETJ3_2_L04_P065" (solid, pour order 65): 96.3,40.1 101.581,40.1 102.21,39.472 102.21,21.307 96.3,15.397
NetJ1_2 on Bottom Layer "NETJ1_2_L04_P064" (solid, pour order 64): 14.2,40.4 19.3,40.4 20.3,39.4 20.3,21.778 14.2,15.678
NetJ3_7 on Bottom Layer "NETJ3_7_L04_P062" (solid, pour order 62): 103.53,16.43 109.5,22.4 109.5,39.929 103.988,39.929 103.53,39.472
NetJ2_7 on Bottom Layer "NETJ2_7_L04_P060" (solid, pour order 60): 62.332,16.6 68.3,22.1 68.3,40.3 63.414,40.3 62.332,39.218
NetJ2_2 on Bottom Layer "NETJ2_2_L04_P063" (solid, pour order 63): 55.095,40.3 60.03,40.3 61.011,39.319 61.011,21.355 55.312,15.842
+12 on Int2 (PWR) (split plane): 123.442,8.13 0.256,8.13 0.256,78.49 123.442,78.49
NetJ1_1 on Int2 (PWR) (split plane): 15.771,37.542 15.703,28.645 15.703,28.644 15.703,19.942 15.705,19.93 15.705,19.929 15.705,17.633 15.701,17.615 15.701,17.611 15.701,15.97 15.711,15.921 15.739,15.879 16.709,14.908 17.397,14.221 17.397,12.703 16.964,12.271 15.243,12.271 8.129,19.384 8.129,23.864 8.129,27.978 8.129,37.312 8.129,37.946 9.054,38.871 15.771,38.871
NetJ1_6 on Int2 (PWR) (split plane): 33.706,38.111 33.706,18.589 32.846,17.729 19.7,17.729 19.65,17.72 19.608,17.692 18.914,16.997 18.886,16.955 18.876,16.906 18.876,15.759 18.246,15.129 16.854,15.129 15.96,16.024 15.96,17.561 19.602,21.204 19.612,21.218 25.992,27.598 26.02,27.64 26.029,27.689 26.029,38.871 32.946,38.871
NetJ2_1 on Int2 (PWR) (split plane): 56.651,29.386 56.651,18.907 56.648,18.893 56.648,17.688 56.646,17.675 56.646,17.56 56.646,15.919 56.656,15.87 56.684,15.828 57.654,14.858 57.67,14.847 58.342,14.175 58.342,14.034 58.341,14.029 58.341,12.652 57.909,12.22 56.188,12.22 49.129,19.278 49.129,37.946 50.054,38.871 56.674,38.871
NetJ3_1 on Int2 (PWR) (split plane): 97.871,35.8 97.871,23.45 97.849,23.418 97.839,23.369 97.839,15.831 97.845,15.803 97.845,15.767 97.855,15.717 97.883,15.675 97.902,15.656 99.05,14.508 99.54,14.018 99.54,12.023 99.146,11.629 97.824,11.629 90.129,19.324 90.129,37 90.129,37.209 97.871,37.209
NetJ2_6 on Int2 (PWR) (split plane): 74.651,37.77 74.651,18.934 73.346,17.629 60.8,17.629 60.75,17.62 60.708,17.592 59.859,16.742 59.831,16.7 59.821,16.651 59.821,15.504 59.396,15.079 57.804,15.079 57.592,15.292 57.576,15.302 56.905,15.973 56.905,16.08 56.907,16.093 56.907,17.624 60.287,21.004 60.294,21.008 66.892,27.606 66.92,27.648 66.929,27.698 66.929,38.871 73.551,38.871
NetJ3_6 on Int2 (PWR) (split plane): 115.85,37.175 115.85,18.633 114.746,17.529 101.9,17.529 101.85,17.52 101.808,17.492 101.058,16.741 101.03,16.699 101.02,16.649 101.02,15.503 100.246,14.729 99.254,14.729 98.104,15.879 98.104,17.407 98.104,17.521 101.592,21.008 101.603,21.025 107.992,27.414 108.02,27.456 108.029,27.506 108.029,37.271 115.754,37.271
GND on Int1 (GND) (split plane): 123.442,8.13 0.256,8.13 0.256,78.49 123.442,78.49

## Other copper
Int2 (PWR) (plane layer: these items are gaps in the copper):
  lines w0.254: 15.832,19.942 15.832,28.644 15.9,37.541 15.9,39 9,39 8,38 8,37.312 8,27.978 8,23.864 8,19.33 15.189,12.141 17.018,12.141 17.526,12.649 17.526,14.275 15.85,15.951 ; 15.834,17.596 15.834,19.929 ; 56.778,16.093 56.778,18.893 ; 56.781,18.833 56.781,29.386 56.804,39 50,39 49,38 49,19.224 56.134,12.09 57.963,12.09 58.471,12.598 58.471,14.029 ; 57.5,15.2 58.45,14.25 ; 58.472,13.673 58.472,14.222 58.475,14.226 ; 79.117,31.813 79.13,31.799 ; 89.993,37.338 98,37.338 98,35.8 98,23.4 97.969,23.369 97.969,15.831 99.7,14.1 ; 90,37.331 90,37 90,19.271 97.771,11.5 99.2,11.5 99.67,11.97 99.67,14.072 97.993,15.748 ; 15.831,15.97 16.801,15 18.3,15 19.006,15.706 19.006,16.906 19.7,17.6 32.9,17.6 33.836,18.536 33.836,38.164 33,39 25.9,39 25.9,27.689 19.511,21.3 19.511,21.295 15.831,17.615 15.831,17.611 15.831,15.97 ; 56.775,15.919 56.775,17.56 56.775,17.675 60.2,21.1 60.202,21.1 66.8,27.698 66.8,39 73.605,39 74.78,37.824 74.78,18.88 73.4,17.5 60.8,17.5 59.951,16.651 59.951,15.451 59.449,14.949 57.746,14.949 56.775,15.919 ; 56.8,15.9 56.8,15.9 ; 97.974,15.767 97.974,17.407 97.974,17.574 101.5,21.1 101.5,21.106 107.9,27.506 107.9,37.4 115.808,37.4 115.979,37.229 115.979,18.579 114.8,17.4 101.9,17.4 101.149,16.649 101.149,15.449 100.3,14.6 99.141,14.6 97.974,15.767

## Silkscreen, mask and mechanical layers (free items; w line width, h text height)
Top Overlay:
  text "CHA" at 38.5,64.516 h1.5
  text "CHB" at 42,64.516 h1.5
  text "SCK" at 27,58.516 h1.5
  text "MISO" at 30.5,58.516 h1.5
  text "MOSI" at 34.5,58.516 h1.5
  text "DIR3" at 45,58.016 h1.5
  text "STP3" at 48.5,58.016 h1.5
  text "CS_AZI" at 0.792,57.028 h1.5
  text "DIR1" at 2,53.3 h1.5
  text "DIR2" at 110.534,51.85 h1.5
  text "STP2" at 105.494,51.808 h1.5
  text "STP1" at 1.8,49.416 h1.5
  text "Design by Motonaut/Nixie" at 22,49.283 h1.5
  text "CS_ALT" at 41.26,48.558 h1.5
  text "REV C" at 33,47.516 h1.5
  text "CS_POL" at 121.647,47.389 h1.5 r90
Board shape:
  drawing of 21 lines, arcs and shapes, not listed

## Text inside footprints (layer, text, board x,y; h text height)
J4: Route Tool Path "PCB Edge" at 124.625,69.255 h0.41 r90
P1: Top Overlay "20" at 112.304,75.392 h1.27; Top Overlay "19" at 112.304,72.852 h1.27; Top Overlay "1" at 85.38,72.852 h1.27; Top Overlay "2" at 85.38,75.392 h1.27
U1: Top Overlay "*" at 55.589,56.381 h1.27 r90; Top Assembly "*" at 55.589,58.864 h1.27 r90
U4A: Top Overlay "*" at 28.34,31.559 h1.27 r180; Top Assembly "*" at 25.775,31.94 h1.27 r180
U4B: Top Overlay "*" at 69.285,31.508 h1.27 r180; Top Assembly "*" at 66.72,31.889 h1.27 r180
U4C: Top Overlay "*" at 110.484,31.356 h1.27 r180; Top Assembly "*" at 107.918,31.737 h1.27 r180